# EAGLE board LED board  (EAGLE 7.5.0)
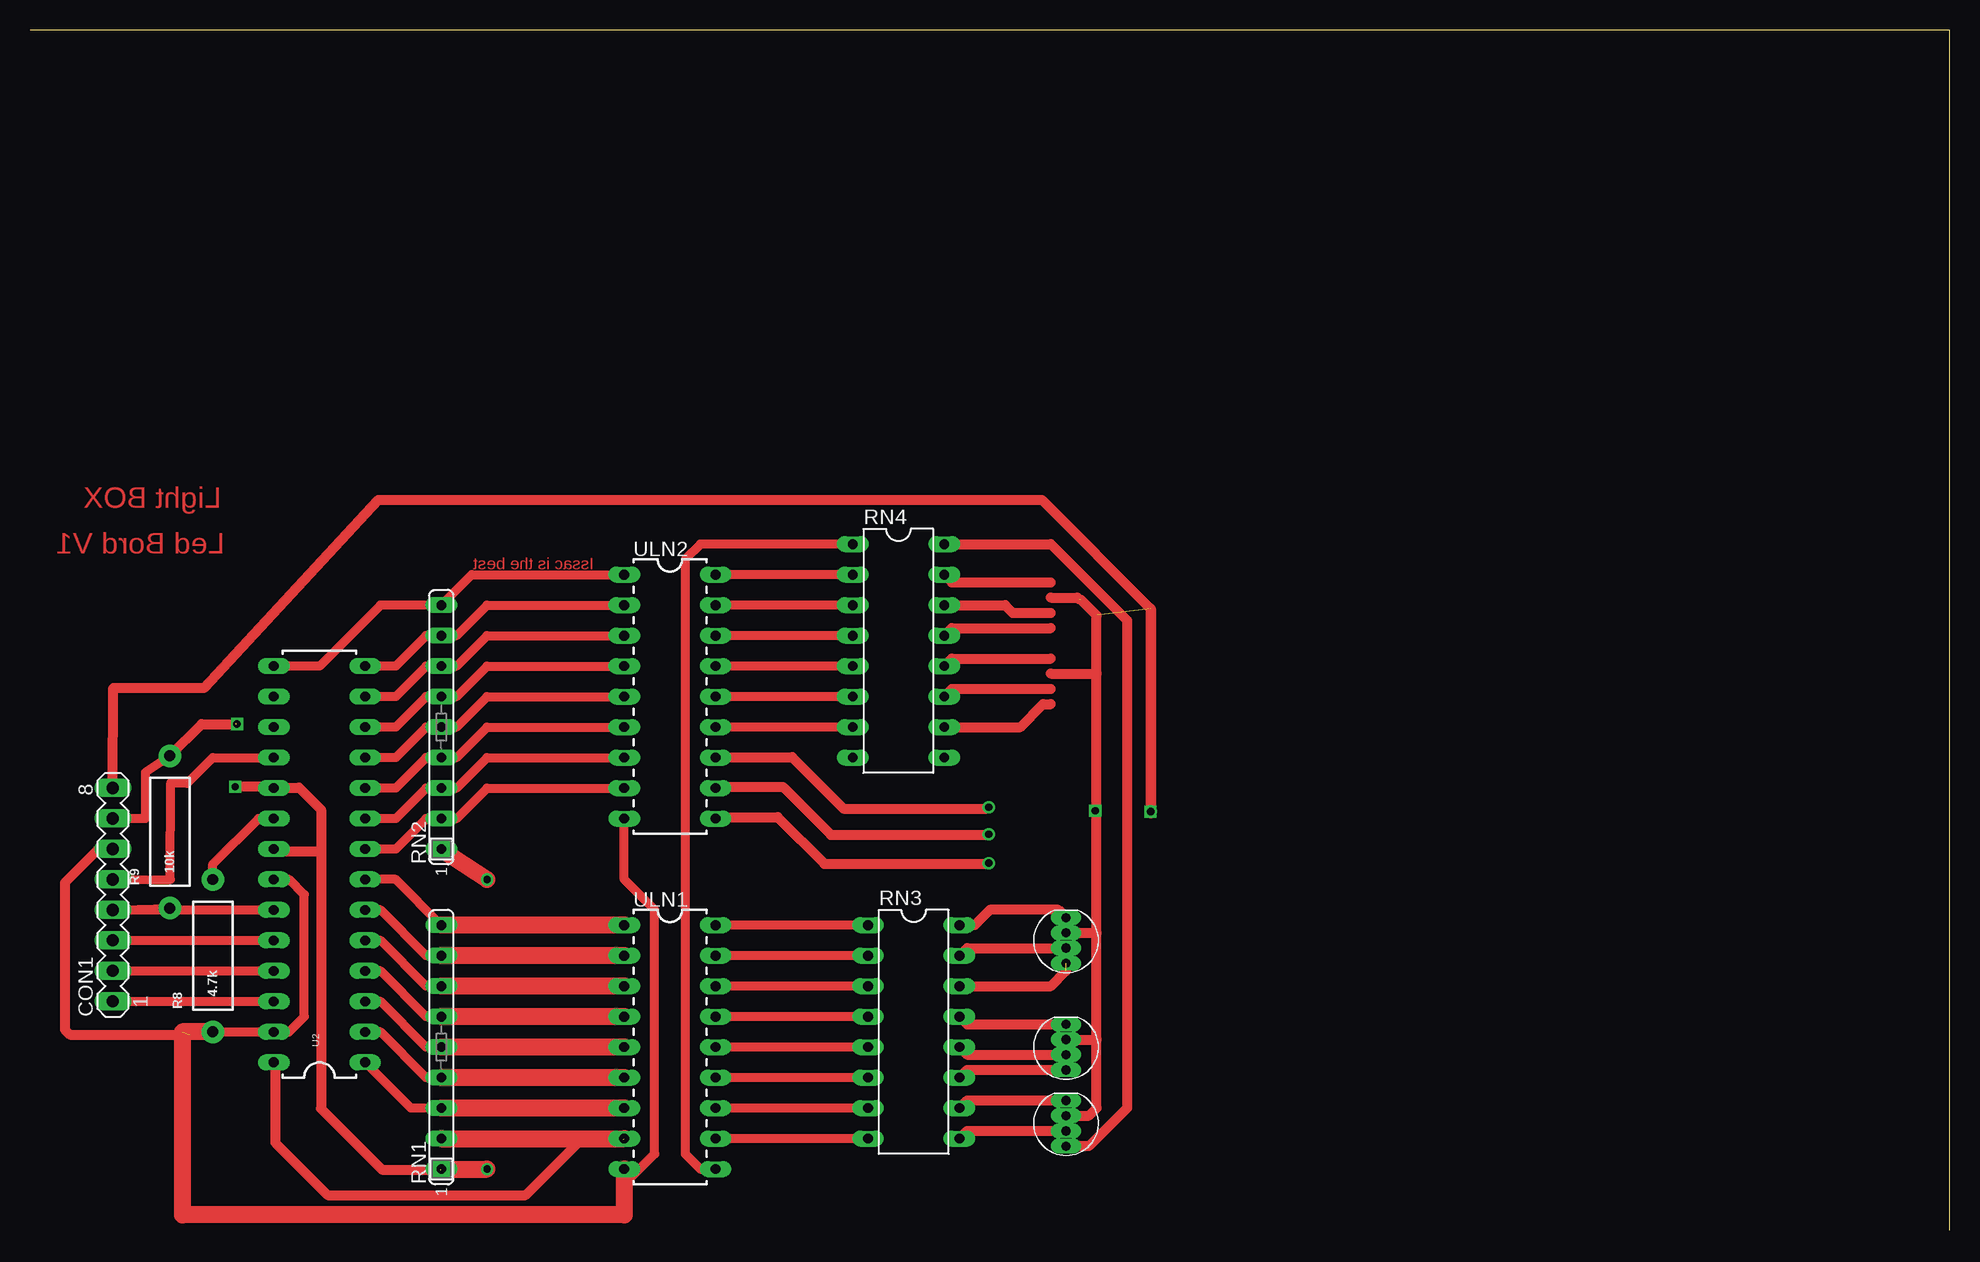
[diagram p0: board, top side]
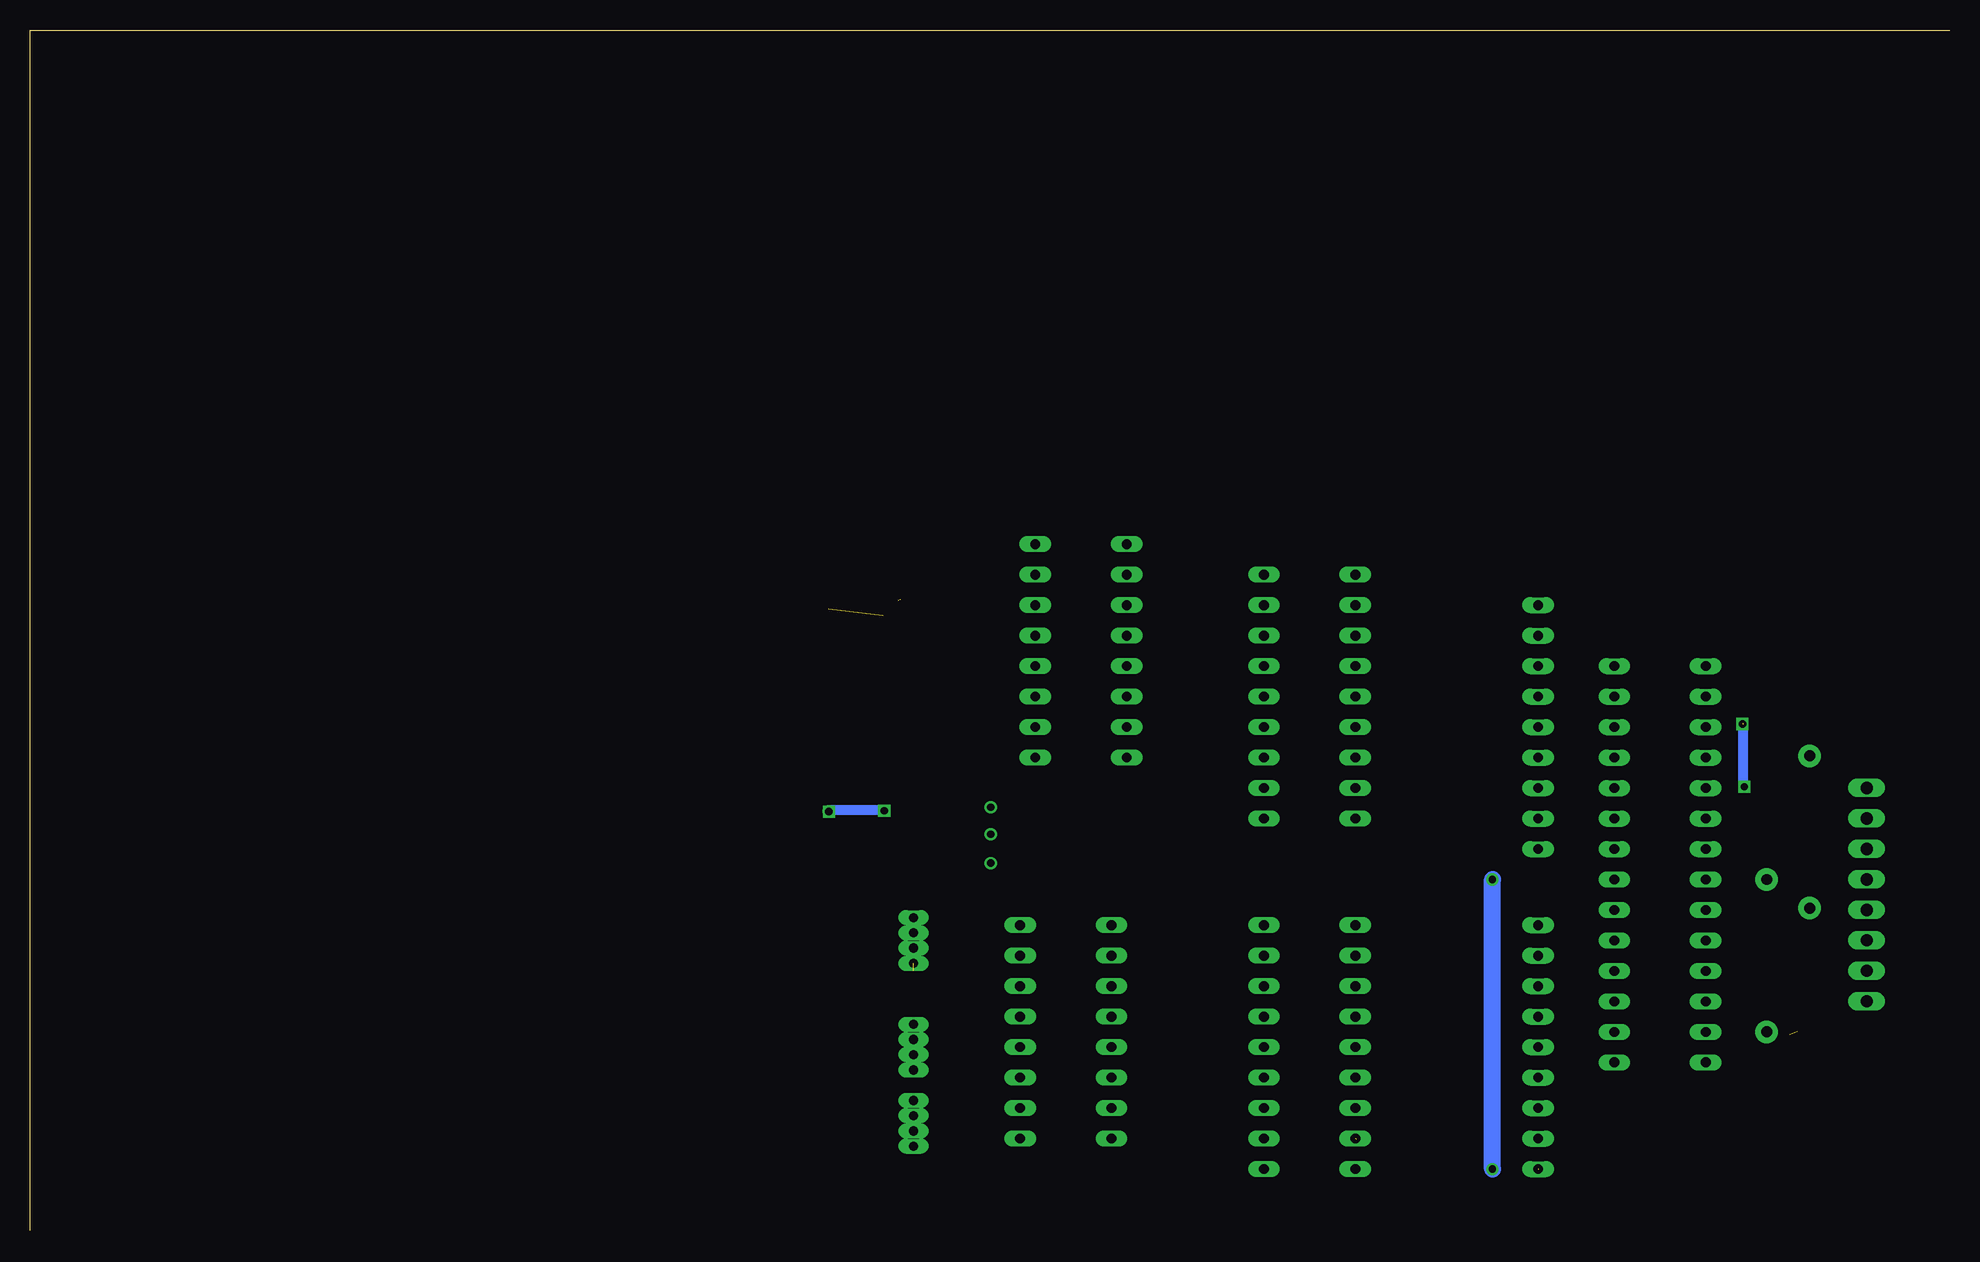
[diagram p1: board, bottom side, seen from below]

Size 160 x 100 mm. Coordinates in mm from the lower left corner, seen from the top.
Outline: 160,0 160,100 0,100
Copper layers (1*16): Top 0.035mm / dielectric 1.5mm / Bottom 0.035mm
Design rules "default": minimum track width 30mil, minimum drill 24mil, track to track 30mil, track to pad 30mil, pad to pad 30mil, via to via 30mil, smd to smd 30mil, copper to edge 40mil, drill to drill 30mil, minimum pad ring 10mil, minimum via ring 8mil, stop-mask expansion 4mil, vias tented up to drill 0mil, thermal gap 10mil

## Footprints (pad centres in the part's own frame; a part is rotated, then mirrored left to right if it is on the bottom)
MA08-1 = drill 1.016 long: 1 -8.89,0; 2 -6.35,0; 3 -3.81,0; 4 -1.27,0; 5 1.27,0; 6 3.81,0; 7 6.35,0; 8 8.89,0
LED-RGB-THRU = drill 0.762 pad 0.889 long: 1 1.905,0; 2 0.635,0; 3 -0.635,0; 4 -1.905,0
AXIAL-0.5 = drill 0.9 pad 1.88: P$1 -6.35,0; P$2 6.35,0
SIL9 = drill 0.813 long: 1 -10.16,0; 2 -7.62,0; 3 -5.08,0; 4 -2.54,0; 5 0,0; 6 2.54,0; 7 5.08,0; 8 7.62,0; 9 10.16,0
DIL16 = drill 0.813 long: 1 -8.89,-3.81; 2 -6.35,-3.81; 3 -3.81,-3.81; 4 -1.27,-3.81; 5 1.27,-3.81; 6 3.81,-3.81; 7 6.35,-3.81; 8 8.89,-3.81; 9 8.89,3.81; 10 6.35,3.81; 11 3.81,3.81; 12 1.27,3.81; 13 -1.27,3.81; 14 -3.81,3.81; 15 -6.35,3.81; 16 -8.89,3.81
DIL28-3 = drill 0.813 long: 1 -16.51,-3.81; 2 -13.97,-3.81; 3 -11.43,-3.81; 4 -8.89,-3.81; 5 -6.35,-3.81; 6 -3.81,-3.81; 7 -1.27,-3.81; 8 1.27,-3.81; 9 3.81,-3.81; 10 6.35,-3.81; 11 8.89,-3.81; 12 11.43,-3.81; 13 13.97,-3.81; 14 16.51,-3.81; 15 16.51,3.81; 16 13.97,3.81; 17 11.43,3.81; 18 8.89,3.81; 19 6.35,3.81; 20 3.81,3.81; 21 1.27,3.81; 22 -1.27,3.81; 23 -3.81,3.81; 24 -6.35,3.81; 25 -8.89,3.81; 26 -11.43,3.81; 27 -13.97,3.81; 28 -16.51,3.81
DIL18 = drill 0.813 long: 1 -10.16,-3.81; 2 -7.62,-3.81; 3 -5.08,-3.81; 4 -2.54,-3.81; 5 0,-3.81; 6 2.54,-3.81; 7 5.08,-3.81; 8 7.62,-3.81; 9 10.16,-3.81; 10 10.16,3.81; 11 7.62,3.81; 12 5.08,3.81; 13 2.54,3.81; 14 0,3.81; 15 -2.54,3.81; 16 -5.08,3.81; 17 -7.62,3.81; 18 -10.16,3.81

## Placement (x,y rotation side)
CON1  CON1  [MA08-1]  6.91,27.94 90 top
D1  LED-RGB-CA-THRUCLEAR  [LED-RGB-THRU]  86.36,24.13 90 top
D2  LED-RGB-CA-THRUCLEAR  [LED-RGB-THRU]  86.36,15.24 90 top
D3  LED-RGB-CA-THRUCLEAR  [LED-RGB-THRU]  86.36,8.89 90 top
R8  4.7k  [AXIAL-0.5]  15.24,22.86 90 top
R9  10k  [AXIAL-0.5]  11.66,33.17 90 top
RN1  10k  [SIL9]  34.29,15.24 90 top
RN2  10k  [SIL9]  34.29,41.91 90 top
RN3  470  [DIL16]  73.66,16.51 270 top
RN4  470  [DIL16]  72.39,48.26 270 top
U2  TLC5940-NT  [DIL28-3]  24.13,30.48 90 top
ULN1  ULN2803  [DIL18]  53.34,15.24 270 top
ULN2  ULN2803  [DIL18]  53.34,44.45 270 top

## Library data of the parts
CON1 = con-lstb; OC_FARNELL: unknown; OC_NEWARK: unknown
D1-D3 = SparkFun-LED; PROD_ID: DIO-10631
R8 R9 = SparkFun-Passives
RN1 RN2 = resistor-sil; OC_FARNELL: unknown; OC_NEWARK: unknown
RN3 RN4 = resistor-dil; OC_FARNELL: unknown; OC_NEWARK: unknown
U2 = SparkFun-DigitalIC
ULN1 ULN2 = SparkFun-PowerIC

## Nets
GND: CON1.6 R8.P$1 U2.22 U2.27 ULN1.9 ULN2.9
N$2: RN3.1 ULN1.18
N$3: RN3.2 ULN1.17
N$4: RN3.3 ULN1.16
N$5: RN3.4 ULN1.15
N$6: RN3.5 ULN1.14
N$7: RN3.6 ULN1.13
N$8: R8.P$2 U2.20
N$9: CON1.4 R9.P$1 U2.23
N$10: CON1.5 U2.18
N$11: CON1.3 U2.24
N$12: CON1.2 U2.25
N$13: CON1.1 U2.26
N$14: RN2.2 U2.8 ULN2.8
N$15: RN1.2 U2.28 ULN1.8
N$16: RN1.3 U2.1 ULN1.7
N$17: RN1.4 U2.2 ULN1.6
N$18: RN1.5 U2.3 ULN1.5
N$19: RN1.6 U2.4 ULN1.4
N$20: RN1.7 U2.5 ULN1.3
N$21: RN1.8 U2.6 ULN1.2
N$22: RN1.9 U2.7 ULN1.1
N$23: RN2.3 U2.9 ULN2.7
N$24: RN2.4 U2.10 ULN2.6
N$25: RN2.5 U2.11 ULN2.5
N$26: RN2.6 U2.12 ULN2.4
N$27: RN2.7 U2.13 ULN2.3
N$28: RN2.8 U2.14 ULN2.2
N$29: RN2.9 U2.15 ULN2.1
N$30: RN3.7 ULN1.12
N$31: RN3.8 ULN1.11
N$32: D1.1 RN3.16
N$33: D1.3 RN3.15
N$34: D1.4 RN3.14
N$35: D2.1 RN3.13
N$36: D2.3 RN3.12
N$37: D2.4 RN3.11
N$38: D3.1 RN3.10
N$39: D3.3 RN3.9
N$40: RN4.1 ULN1.10
N$41: D3.4 RN4.16
N$42: RN4.2 ULN2.18
N$43: RN4.3 ULN2.17
N$44: RN4.4 ULN2.16
N$45: RN4.5 ULN2.15
N$46: RN4.6 ULN2.14
N$47: RN4.7 ULN2.13
N$49: RN4.15
N$50: RN4.14
N$51: RN4.13
N$52: RN4.12
N$53: RN4.11
N$54: RN4.10
VCC: CON1.7 R9.P$2 RN1.1 RN2.1 U2.19 U2.21
VCC+12: CON1.8 D1.2 D2.2 D3.2

## Tracks (layer width: path | path; a pad name or v marks a point on that pad's centre or on a via)
GND  (1 unrouted)
  Top 0.762: R8.P$1 U2.27 21.59,16.51 22.86,17.78 22.86,27.94 21.59,29.21 U2.22 | ULN2.9 49.53,29.21 52.07,26.67 52.07,6.35 49.53,3.81
  Top 0.813: CON1.6 6.85,31.7 5.66,31.7 2.9,28.94 2.9,16.7 3.32,16.27 13.29,16.27
  Top 1.422: ULN1.9 49.53,3.81 49.53,1.27 12.7,1.27 12.7,16.51 R8.P$1
N$1  (via drill 0.6)
  other vias: 17.11,36.93
N$2
  Top 0.762: RN3.1 ULN1.18
N$3
  Top 0.762: RN3.2 ULN1.17
N$4
  Top 0.762: RN3.3 ULN1.16
N$5
  Top 0.762: RN3.4 ULN1.15
N$6
  Top 0.762: RN3.5 ULN1.14
N$7
  Top 0.762: RN3.6 ULN1.13
N$8
  Top 0.762: U2.20 19.05,34.29 15.24,30.48 R8.P$2
N$9
  Top 0.762: U2.23 CON1.4 7.62,26.67 R9.P$1
N$10
  Top 0.762: U2.18 15.24,39.37 13.08,37.21 11.74,37.28 11.7,29.2 CON1.5
N$11
  Top 0.762: CON1.3 U2.24
N$12
  Top 0.762: CON1.2 U2.25
N$13
  Top 0.762: CON1.1 U2.26
N$14
  Top 0.762: ULN2.8 38.1,36.83 35.56,34.29 RN2.2 33.02,34.29 30.48,31.75 U2.8
N$15  (1 unrouted)
  Top 0.813: U2.28 20.44,13.85 20.44,7.29 24.82,2.9 41.3,2.9 45.97,7.57 49.43,7.57
  Top 1.422: RN1.2 ULN1.8
N$16
  Top 0.762: U2.1 31.75,10.16 RN1.3
  Top 1.422: ULN1.7 RN1.3
N$17
  Top 0.762: U2.2 29.21,16.51 33.02,12.7 RN1.4
  Top 1.422: ULN1.6 RN1.4
N$18
  Top 0.762: U2.3 29.21,19.05 33.02,15.24 RN1.5
  Top 1.422: ULN1.5 RN1.5
N$19
  Top 0.762: U2.4 29.21,21.59 33.02,17.78 RN1.6
  Top 1.422: ULN1.4 RN1.6
N$20
  Top 0.762: U2.5 29.21,24.13 33.02,20.32 RN1.7
  Top 1.422: ULN1.3 RN1.7
N$21
  Top 0.762: U2.6 29.21,26.67 33.02,22.86 RN1.8
  Top 1.422: ULN1.2 RN1.8
N$22
  Top 0.762: U2.7 30.48,29.21 RN1.9
  Top 1.422: ULN1.1 RN1.9
N$23
  Top 0.762: ULN2.7 38.1,39.37 35.56,36.83 RN2.3 33.02,36.83 30.48,34.29 U2.9
N$24
  Top 0.762: ULN2.6 38.1,41.91 35.56,39.37 RN2.4 33.02,39.37 30.48,36.83 U2.10
N$25
  Top 0.762: ULN2.5 38.1,44.45 35.56,41.91 RN2.5 33.02,41.91 30.48,39.37 U2.11
N$26
  Top 0.762: ULN2.4 38.1,46.99 35.56,44.45 RN2.6 33.02,44.45 30.48,41.91 U2.12
N$27
  Top 0.762: ULN2.3 38.1,49.53 35.56,46.99 RN2.7 33.02,46.99 30.48,44.45 U2.13
N$28
  Top 0.762: ULN2.2 38.1,52.07 35.56,49.53 RN2.8 33.02,49.53 30.48,46.99 U2.14
N$29
  Top 0.762: ULN2.1 36.83,54.61 RN2.9 29.21,52.07 24.13,46.99 U2.15
N$30
  Top 0.762: RN3.7 ULN1.12
N$31
  Top 0.762: RN3.8 ULN1.11
N$32
  Top 0.813: D1.1 85.72,26.67 80.01,26.67 78.74,25.4 RN3.16
N$33
  Top 0.813: RN3.15 78.11,23.5 D1.3
N$34  (1 unrouted)
  Top 0.813: RN3.14 85.09,20.32 86.36,21.59
N$35
  Top 0.813: RN3.13 78.11,17.14 D2.1
N$36
  Top 0.813: RN3.12 78.11,14.61 D2.3
N$37
  Top 0.813: RN3.11 78.11,13.34 D2.4
N$38
  Top 0.813: RN3.10 78.11,10.79 D3.1
N$39
  Top 0.813: RN3.9 78.11,8.26 D3.3
N$40
  Top 0.762: ULN1.10 55.88,5.08 54.61,6.35 54.61,55.88 55.88,57.15 RN4.1
N$41
  Top 0.813: RN4.16 85.09,57.15 91.44,50.8 91.44,10.16 88.27,6.99 D3.4
N$42
  Top 0.762: RN4.2 ULN2.18
N$43
  Top 0.762: RN4.3 ULN2.17
N$44
  Top 0.762: RN4.4 ULN2.16
N$45
  Top 0.762: RN4.5 ULN2.15
N$46
  Top 0.762: RN4.6 ULN2.14
N$47
  Top 0.762: RN4.7 ULN2.13
N$48  (via drill 0.6)
  other vias: 88.79,34.93
N$49
  Top 0.813: RN4.15 76.83,53.98 85.09,53.98
N$50
  Top 0.813: RN4.14 81.28,52.07 81.92,51.44 85.09,51.44
N$51
  Top 0.813: RN4.13 76.83,50.16 85.09,50.16
N$52
  Top 0.813: RN4.12 76.83,47.62 85.09,47.62
N$53
  Top 0.813: RN4.11 76.83,45.09 85.09,45.09
N$54
  Top 0.813: RN4.10 82.55,41.91 84.45,43.81 85.09,43.81
N$55
  Top 0.813: 57.29,39.4 63.54,39.4 67.81,35.12 79.75,35.12
N$56  (via drill 0.6)
  other vias: 17.26,42.17
N$57
  Top 0.813: 57.29,36.77 57.46,36.93 62.77,36.93 66.77,32.93 79.75,32.93
N$58
  Top 0.813: 57.02,34.3 57.13,34.41 62.33,34.41 66.22,30.52 79.91,30.52
N$59  (via drill 0.6)
  other vias: 79.91,35.23 79.91,35.23 79.91,35.23
N$60  (via drill 0.6)
  other vias: 79.91,32.99
N$61  (via drill 0.6)
  other vias: 79.91,30.58
VCC  (via drill 0.6)  (2 unrouted)
  Top 0.762: CON1.7 7.62,34.29 9.62,34.29 9.62,38.13 R9.P$2
  Top 0.813: R9.P$2 14.3,42.17 17.18,42.17 | 24.26,31.55 24.26,35.02 22.42,36.86 20.35,36.86 U2.19 20.22,36.93 v17.11,36.93 | 24.26,31.55 24.26,10.12 29.35,5.02 34.23,5.02 | U2.21 20.52,31.55 24.26,31.55
  Top 1.422: RN1.1 v38.1,5.08 | RN2.1 v38.1,29.21
  Bottom 0.813: v17.11,36.93 17.18,37 17.18,42.24
  Bottom 1.422: v38.1,5.08 v38.1,29.21
VCC+12  (via drill 0.6)  (2 unrouted)
  Top 0.813: D3.2 88.27,9.53 88.9,10.16 88.9,15.88 | 88.9,15.88 88.9,24.77 | 88.9,24.77 88.9,46.35 | 88.9,46.35 88.9,51.23 87.63,52.5 | 85.09,52.7 87.28,52.7 87.42,52.57 | 85.09,46.35 88.9,46.35 | D1.2 88.9,24.77 | D2.2 88.9,15.88 | CON1.8 6.94,45.18 14.51,45.19 29.04,60.85 84.33,60.85 93.41,51.77 | 93.41,51.77 v93.41,34.85 93.41,34.69 | 93.41,51.77 93.42,51.77 v93.42,34.88
  Bottom 0.813: v93.42,34.88 93.28,35.02 88.9,35.02

## Text on the board
Top: Light BOX | Led Bord V1 | Issac is the best